# Altium PCB masslink.PcbDoc
Units mil, origin at the board's own origin, x right, y up, seen from the top; angles counter-clockwise.
Board outline 6000 x 4000 mil, 2 copper layers (Top Layer, Bottom Layer); 38 components, 34 nets, 149 pads, 0 vias.
Unrouted connection lines stored in the file: 84.
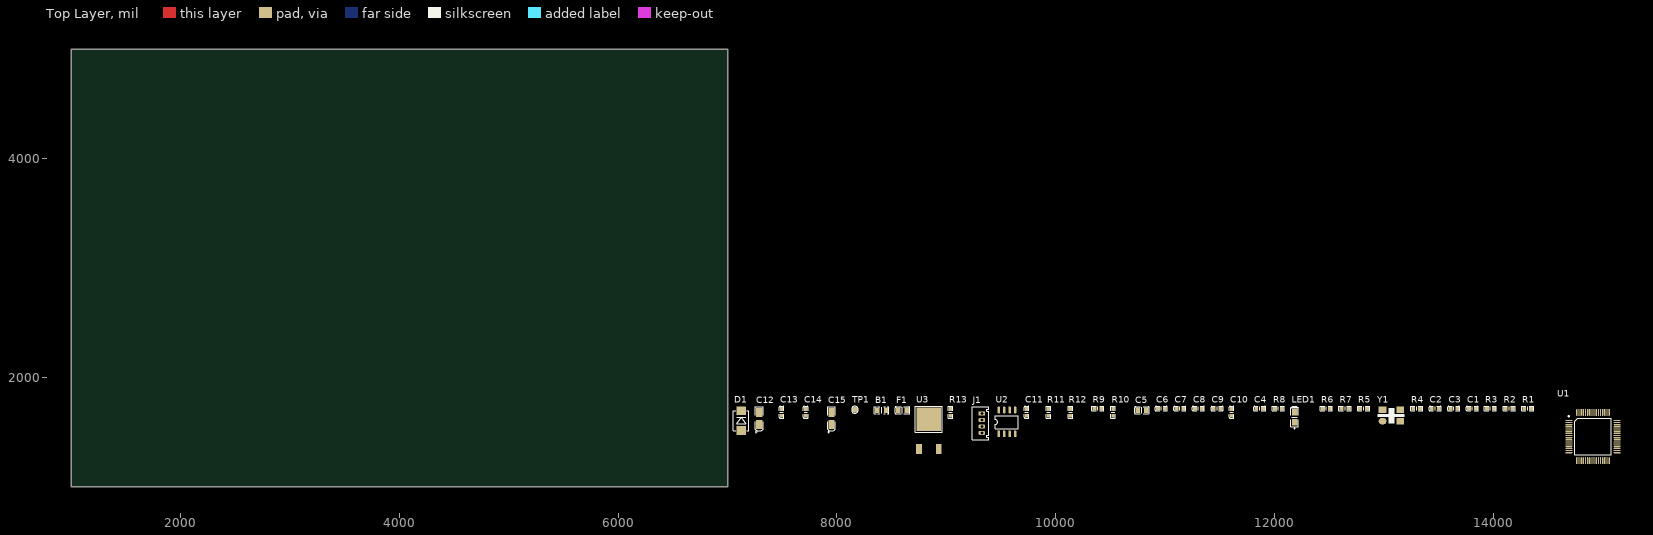
[diagram p0: Top Layer view]
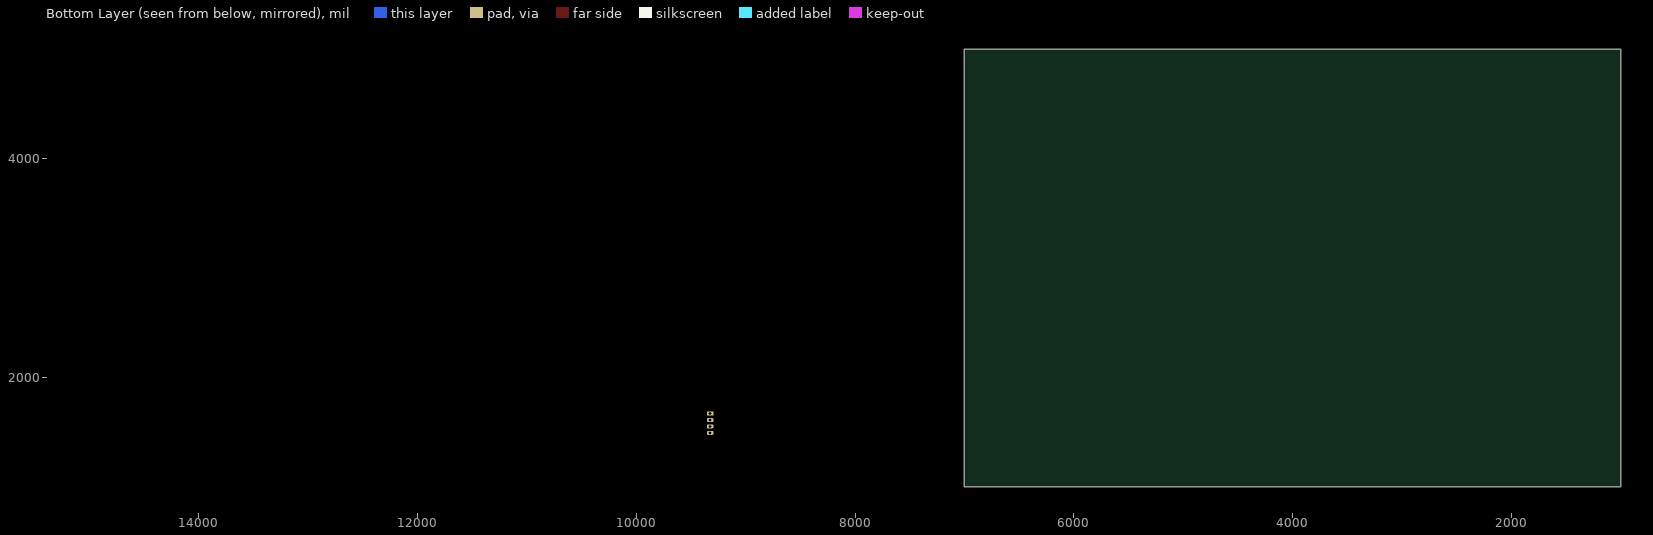
[diagram p1: Bottom Layer view, seen from below]

## Layer stack, top to bottom
Top Solder: solder mask 0.4, Solder Resist, Dk 3.5
Top Layer: signal copper 1.4
Dielectric 1: dielectric 12.6, FR-4, Dk 4.8
Bottom Layer: signal copper 1.4
Bottom Solder: solder mask 0.4, Solder Resist, Dk 3.5

## Board outline
1000,1000 7000,1000 7000,5000 1000,5000

## Design rules (kind name [scope] priority, off if disabled: settings)
Clearance [All] p1: gap=10 ignorepadtopadclearanceinfootprint=FALSE except(0: Arc-Hole Track-Hole SMDPad-Hole THPad-Hole Via-Hole Fill-Hole Poly-Hole Region-Hole Text-Hole)
PolygonConnect [All] p1: connectstyle=Relief reliefconductorwidth=10 reliefentries=4 polygonreliefangle="90 Angle" airgapwidth=10
RoomDefinition MCU [InComponentClass('MCU')] p1: confinementstyle=ConfineIn formatcopy=TRUE lockcomponents=FALSE outline 12925,1560 13200,1560 13200,1845 12925,1845
RoutingVias [All] p1: holewidth=28 width=50 viastyle="Through Hole" minholewidth=28 minwidth=50 maxholewidth=28 maxwidth=50
SolderMaskExpansion [All] p1: expansion=4
Width [All] p1: maxlimit=10 minlimit=10 preferedwidth=10
30 further rules are at their usual default settings.

## Classes and differential pairs
component class MCU: B? C37 C38 C39 C42 C43 C44 C46 C47 C48 C51 C? D? F? J2 LED2 R69 R70 R71 R72 R80 R81 R82 R83 R84 R85 R? TP? U11 U? Y1

## Components (designator, comment, footprint, x,y, rotation, side; value= is the part's Value field where it differs from the comment)
B1 "220R" RCL0805TH 8370,1700 r0 top
C1 "104-0603-25V" RCC0603TH 13780,1715 r0 top
C2 "15PF-0603-15V" RCC0603TH 13440,1715 r0 top
C3 "15PF-0603-15V" RCC0603TH 13610,1715 r0 top
C4 "104-0603-25V" RCC0603TH 11835,1715 r0 top
C5 "105-0805-25V" RCC0805TH 10750,1700 r0 top
C6 "104-0603-25V" RCC0603TH 10935,1715 r0 top
C7 "104-0603-25V" RCC0603TH 11105,1715 r0 top
C8 "104-0603-25V" RCC0603TH 11275,1715 r0 top
C9 "104-0603-25V" RCC0603TH 11445,1715 r0 top
C10 "104-0603-25V" RCC0603TH 11610,1650 r90 top
C11 "104-0603-25V" RCC0603TH 9735,1650 r90 top
C12 "475-3216-25V" RCCT-3216B 7290,1570 r90 top
C13 "104-0603-25V" RCC0603TH 7495,1650 r90 top
C14 "104-0603-25V" RCC0603TH 7715,1650 r90 top
C15 "475-3216-25V" RCCT-3216B 7950,1570 r90 top
D1 "SZ1SMB5.0AT3G" RCD-SMBTH 7125,1515 r90 top
F1 "FSMD050-0805R" RCC0805TH 8560,1700 r0 top
J1 "SWD_PORT" RCJ1.5-4CA 9325,1670 r90 top
LED1 "Status" RCD-LED0805TH 12185,1590 r90 top
R1 "510R-0603-J" RCR0603TH 14285,1715 r0 top
R2 "510R-0603-J" RCR0603TH 14115,1715 r0 top
R3 "1K-0603-J" RCR0603TH 13945,1715 r0 top
R4 "10K-0603-J" RCR0603TH 13270,1715 r0 top
R5 "10K-0603-J" RCR0603TH 12785,1715 r0 top
R6 "10K-0603-J" RCR0603TH 12445,1715 r0 top
R7 "0R-0603-J" RCR0603TH 12615,1715 r0 top
R8 "2.2K-0603-J" RCR0603TH 12005,1715 r0 top
R9 "4.7K-0603-J" RCR0603TH 10355,1715 r0 top
R10 "4.7K-0603-J" RCR0603TH 10525,1650 r90 top
R11 "4.7K-0603-J" RCR0603TH 9935,1650 r90 top
R12 "4.7K-0603-J" RCR0603TH 10135,1650 r90 top
R13 "10K-0603-J" RCR0603TH 9040,1650 r90 top
TP1 "Test Point" RCTOOL-TPB 8165,1705 r0 top
U1 "STM32F103RC" RCIC-LQFP-64B 14694.06,1607.48 r0 top
U2 "AT24C02" RCIC-SOIC8 9480,1485 r0 top
U3 "P5501TG" RCQ-DPAK 8750,1345 r0 top
Y1 "8MHz" RCJT-5X3THB 12990,1600 r0 top

## Footprints (in the part's own frame and the unit in brackets; to place one, negate y for a bottom-side part, rotate by r counter-clockwise, add the part's x,y. Pads: shape width x height; smd on the part's side, far side on the other; paste and mask are expansions set on the pad)
RCC0603TH [mil]
  rect 35x30 smd: 1(0,0) 2(62.99,0)
  silkscreen extent -24,-21 87,21
RCC0805TH [mil]
  rect 40x54 smd: 1(0,0) 2(78.74,0)
  silkscreen extent -27,-33 106,33
RCCT-3216B [mm]
  rect 2x1.4 smd: 1(0,0) 2(2.8,0)
  silkscreen extent -1.98,-0.9 4.1,0.91, body extent -0.3,-0.9 3.1,0.9, height 1.8
RCD-LED0805TH [mm]
  rect 1.5x1.27 smd: 1(0,0) 2(2.286,0)
  silkscreen extent -1.63,-0.89 3.7,0.89
RCD-SMBTH [mil]
  rect 80x85 smd: 1(0,0) 2(180,0)
  silkscreen extent -1,-71 181,71
RCIC-LQFP-64B [mm] "焊盘的长度和宽度增加"
  rect 1.6x0.3 smd: 1(0,0)
  oval 1.6x0.3 smd: 2(0,-0.5) 3(0,-1) 4(0,-1.5) 5(0,-2) 6(0,-2.5) 7(0,-3) 8(0,-3.5) 9(0,-4) 10(0,-4.5) 11(0,-5) 12(0,-5.5) 13(0,-6) 14(0,-6.5) 15(0,-7) 16(0,-7.5) 33(11.2,-7.5) 34(11.2,-7) 35(11.2,-6.5) 36(11.2,-6) 37(11.2,-5.5) 38(11.2,-5) 39(11.2,-4.5) 40(11.2,-4) 41(11.2,-3.5) 42(11.2,-3) 43(11.2,-2.5) 44(11.2,-2) 45(11.2,-1.5) 46(11.2,-1) 47(11.2,-0.5) 48(11.2,0)
  oval 0.3x1.6 smd: 17(1.85,-9.35) 18(2.35,-9.35) 19(2.85,-9.35) 20(3.35,-9.35) 21(3.85,-9.35) 22(4.35,-9.35) 23(4.85,-9.35) 24(5.35,-9.35) 25(5.85,-9.35) 26(6.35,-9.35) 27(6.85,-9.35) 28(7.35,-9.35) 29(7.85,-9.35) 30(8.35,-9.35) 31(8.85,-9.35) 32(9.35,-9.35) 49(9.35,1.85) 50(8.85,1.85) 51(8.35,1.85) 52(7.85,1.85) 53(7.35,1.85) 54(6.85,1.85) 55(6.35,1.85) 56(5.85,1.85) 57(5.35,1.85) 58(4.85,1.85) 59(4.35,1.85) 60(3.85,1.85) 61(3.35,1.85) 62(2.85,1.85) 63(2.35,1.85) 64(1.85,1.85)
  silkscreen extent -0.2,-8 9.85,1.1, body extent 0.6,-8.75 10.6,1.25, height 1.6
RCIC-SOIC8 [mm]
  rect 0.635x1.6 smd: 1(0,0)
  oval 0.635x1.6 smd: 2(1.27,0) 3(2.54,0) 4(3.81,0) 5(3.81,5.537) 6(2.54,5.537) 7(1.27,5.537) 8(0,5.537)
  silkscreen extent -0.81,1.22 4.5,4.24, body extent -0.65,0.78 4.35,4.78, height 1.75
RCJ1.5-4CA [mm]
  rect 1x1.6 hole 0.7: 1(0,0)
  oval 1x1.6 hole 0.7: 2(-1.5,0) 3(-3,0) 4(-4.5,0)
  silkscreen extent -6.1,-1.6 1.6,2.2
RCJT-5X3THB [mm]
  oval 1.8x1.5 smd: 1(0,0)
  round 0.5 on Top Overlay: 2(-1.245,-0.635)
  rect 1.8x1.5 smd: 2(4.089,0) 3(4.089,2.667) 4(0,2.667)
  silkscreen extent -1,-0.3 5.09,2.99
RCL0805TH [mil]
  rect 40x54 smd: 1(0,0) 2(78.74,0)
  silkscreen extent -27,-33 106,33
RCQ-DPAK [mil]
  rect 52x90 smd: 1(0,0) 3(180,0)
  rect 225x215 smd: 2(90,272)
  silkscreen extent -32,154 212,390
RCR0603TH [mil]
  rect 35x30 smd: 1(0,0) 2(62.99,0)
  silkscreen extent -24,-21 87,21, body extent 1,-15 61,15, height 24
RCTOOL-TPB [mm]
  round 1.4 smd: 1(0,0)
  silkscreen extent -0.8,-0.8 0.8,0.8

## Part data
B1: library part Bead, "Bead,1400mA", Comments=220R, Ordering=BLM21PG221SN1
C1 C2 C3 C4 C5 C6 C7 C8 C9 C10 C11 C13 C14: library part Cap_Nonpolar, "无极性电容"
  C1 C4 C6 C7 C8 C9 C10 C11 C13 C14: Comments=104-0603-25V
  C2 C3: Comments=15PF-0603-15V
  C5: Comments=105-0805-25V
C12 C15: library part Cap_polar, "有极性电容", Comments=475-3216-25V
D1: library part DiodeA, "Zener,Tvs", Comments=SZ1SMB5.0AT3G, Ordering=SZ1SMB5.0AT3G
F1: library part FUSE, "fuse", Manufacture=LittleFuse, Comments=FSMD050-0805R, Ordering=FSMD050-0805R
LED1: library part LEDA, Comments=Status
R1 R2 R3 R4 R5 R6 R7 R8 R9 R10 R11 R12 R13: library part RES_AMERICAN, "电阻 美式"
  R1 R2: Comments=510R-0603-J
  R3: Comments=1K-0603-J
  R4 R5 R6 R13: Comments=10K-0603-J
  R7: Comments=0R-0603-J
  R8: Comments=2.2K-0603-J
  R9 R10 R11 R12: Comments=4.7K-0603-J
TP1: library part "TP Point"
U1: library part STM32F10XR8, "ST Cortex M3 32bits MCU", Manufacture=ST, Comments=STM32F103RC
U2: library part AT24C0X, Comments=AT24C02
U3: library part P5501, Comments=P5501TG, Ordering=NCV5501DT33G
Y1: library part Crystal_B, Comments=8MHz
J1: Comments=SWD_PORT

## Nets (pads, with @x,y where several pads share a name; then routed paths per layer and width w, separated by ;. In a path a pad name is that pad's centre, name@x,y a point inside that pad or via, vN(x,y) a via of type N, cw(c..) or ccw(c..) an arc to the next point about the centre after c; other vN are vias at no path point)
5V: F1.1
+3.3V_MCU: C5.1 C6.2 C7.2 C8.2 C9.2 C10.2 C11.2 C14.1 C15.1 J1.4 R5.2 R6.2 R7.1 R8.2 R9.2 R10.2 R11.2 R12.2 TP1.1 U1.13 U1.19 U1.32 U1.48 U1.64 U2.1 U2.2 U2.3 U2.8 U3.3
CH0: U1.14
CH1: U1.15
CH2: U1.16
CH3: U1.17
CH4: U1.20
CH5: U1.21
CH9: U1.22
CH10: U1.23
GND: C1.2 C2.1 C3.2 C4.1 C5.2 C6.1 C7.1 C8.1 C9.1 C10.1 C11.1 C12.2 C13.2 C14.2 C15.2 D1.1 J1.1 R4.2 R13.1 U1.12 U1.18 U1.31 U1.47 U1.63 U2.4 U3.2 Y1.2@13151,1600 Y1.4
I2C_SCL: R10.1 U1.61 U2.6
I2C_SDA: R9.1 U1.62 U2.5
NetB1_1: B1.1 C12.1 D1.2 F1.2
NetB1_2: B1.2 C13.1 U3.1
NetLED1_1: LED1.1 R8.1
NetLED1_2: LED1.2 U1.3
NetR1_2: R1.2 U1.26
NetR2_2: R2.2 U1.27
NetR3_2: R3.2 U1.28
NetR4_1: R4.1 U1.60
NetR5_1: R5.1 U1.2
NetR7_2: R7.2 U1.1
NetR13_2: R13.2 U2.7
NRST: C4.2 R6.1 U1.7
OSC_IN: C2.2 U1.5 Y1.3
OSC_OUT: C3.1 U1.6 Y1.1
PWON: R2.1
Rst: C1.1 R3.1
Status: R1.1
SWCLK: J1.3 R11.1 U1.49
SWDIO: J1.2 R12.1 U1.46
USART_RX: U1.59
USART_TX: U1.58
pads on no net: U1.4 U1.8 U1.9 U1.10 U1.11 U1.24 U1.25 U1.29 U1.30 U1.33 U1.34 U1.35 U1.36 U1.37 U1.38 U1.39 U1.40 U1.41 U1.42 U1.43 U1.44 U1.45 U1.50 U1.51 U1.52 U1.53 U1.54 U1.55 U1.56 U1.57 Y1.2@12941,1575